# Altium PCB FEEL_2021.PcbDoc
Units mm, origin at the board's own origin, x right, y up, seen from the top; angles counter-clockwise.
Board outline 40 x 30 mm, 4 copper layers (Top Layer, GND, POWER, Bottom Layer), stack 0.898 mm thick; 64 components, 51 nets, 256 pads, 253 vias.
Unrouted connection lines stored in the file: 6.
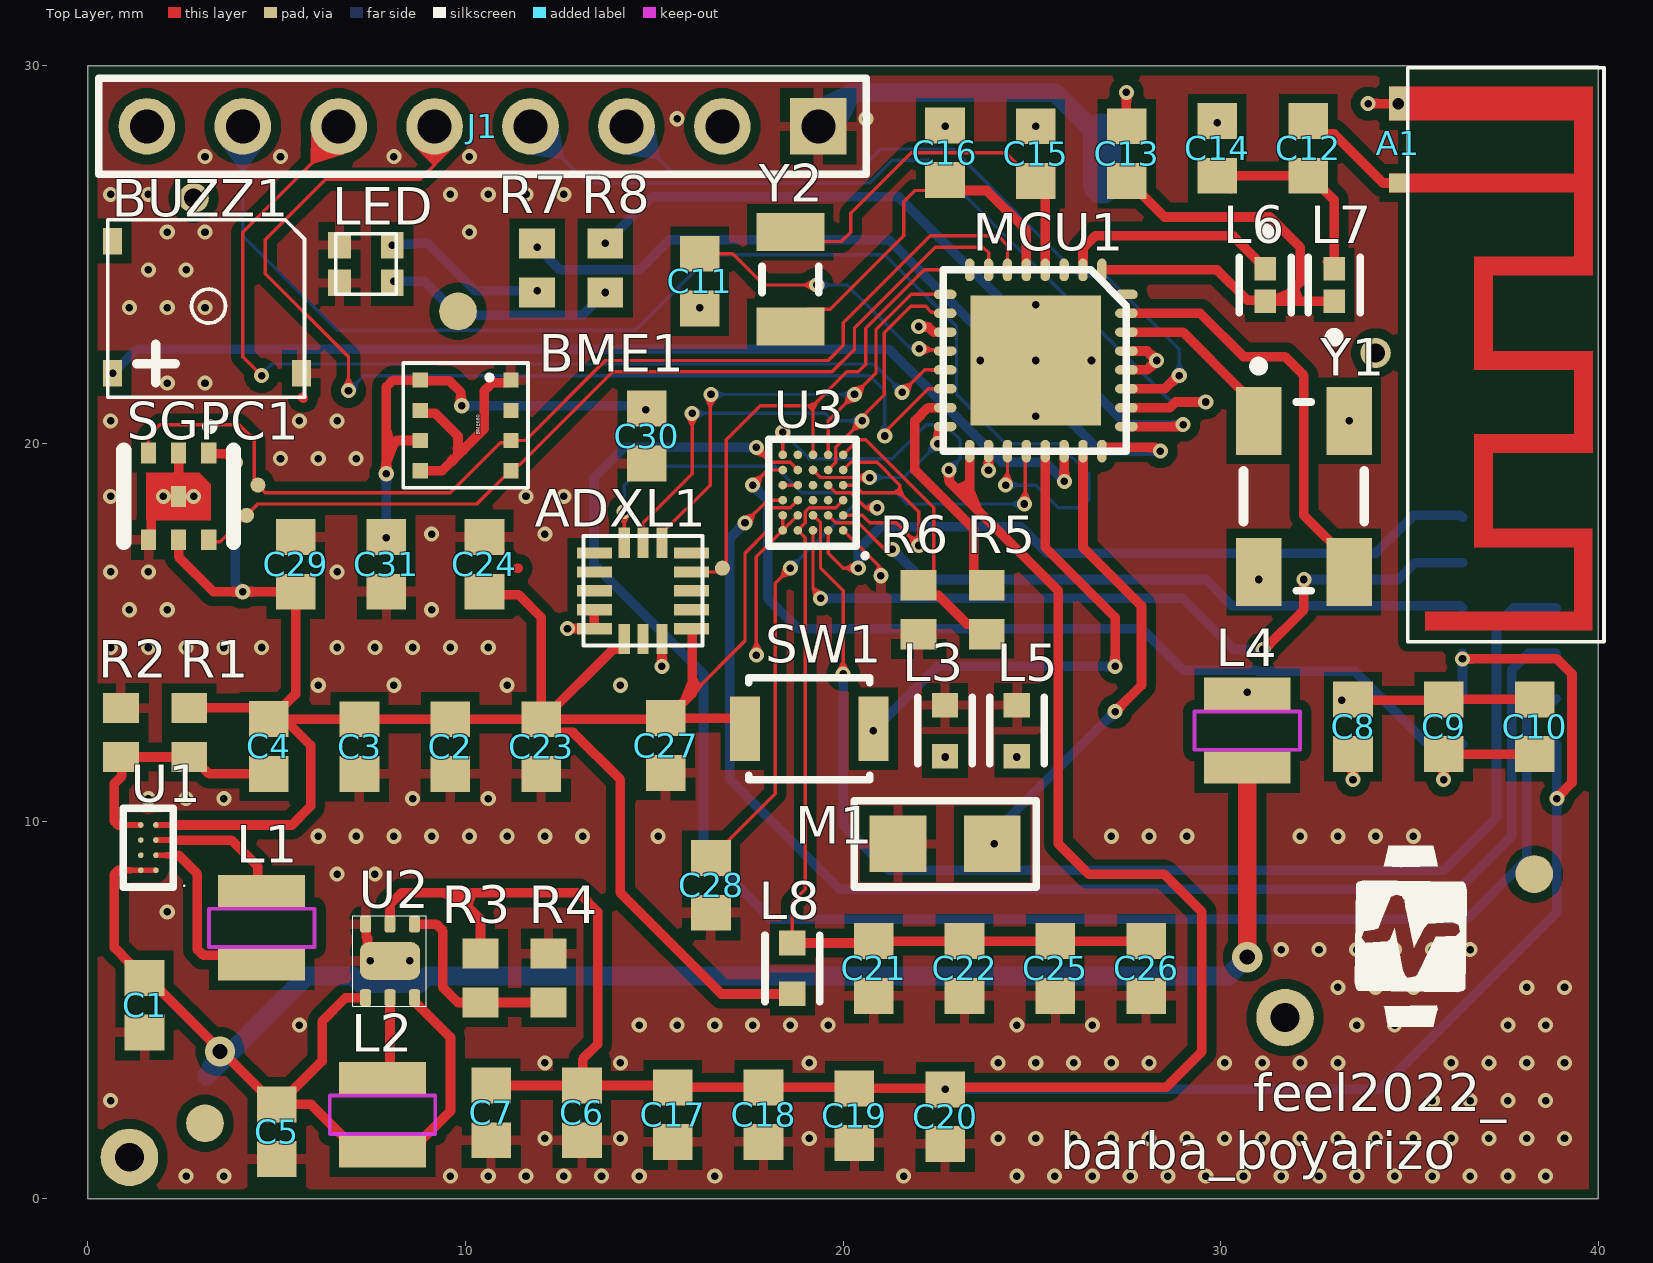
[diagram p0: Top Layer view]
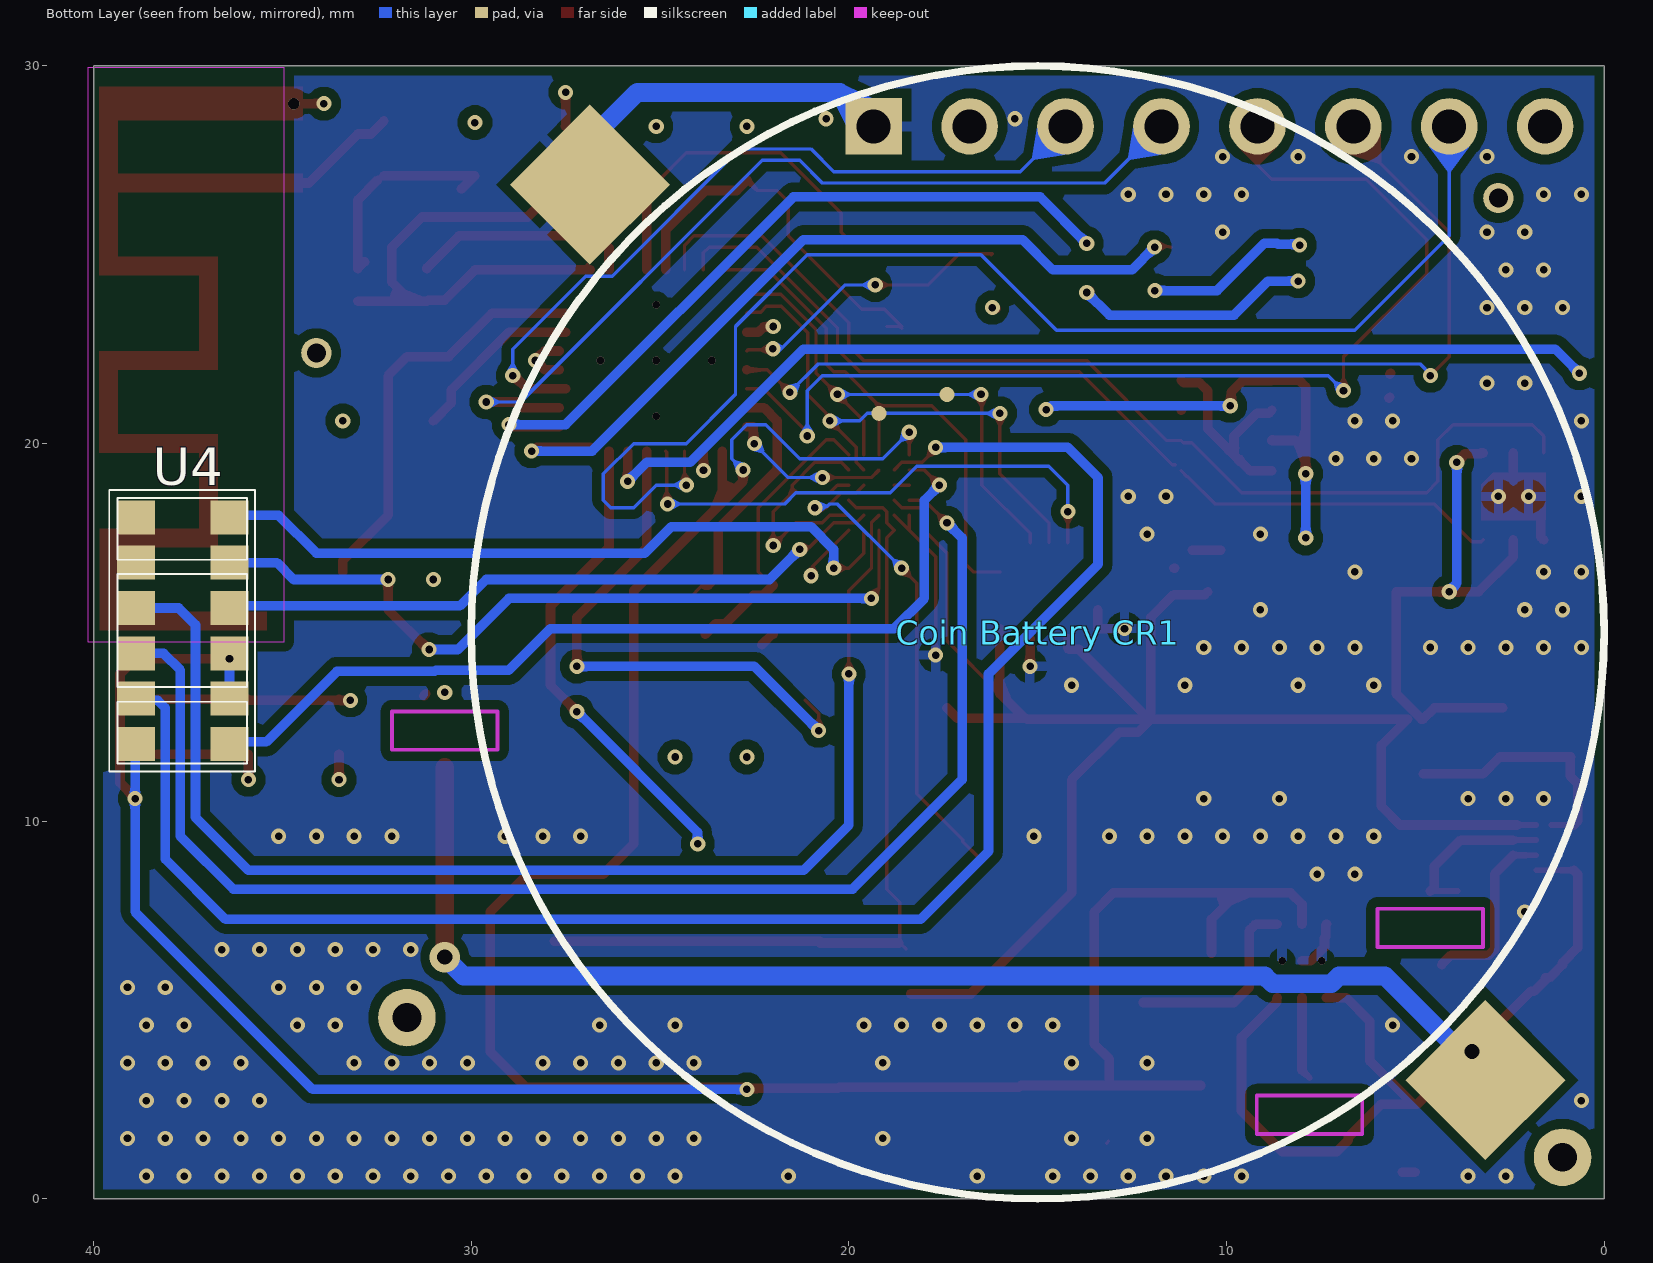
[diagram p1: Bottom Layer view, seen from below]
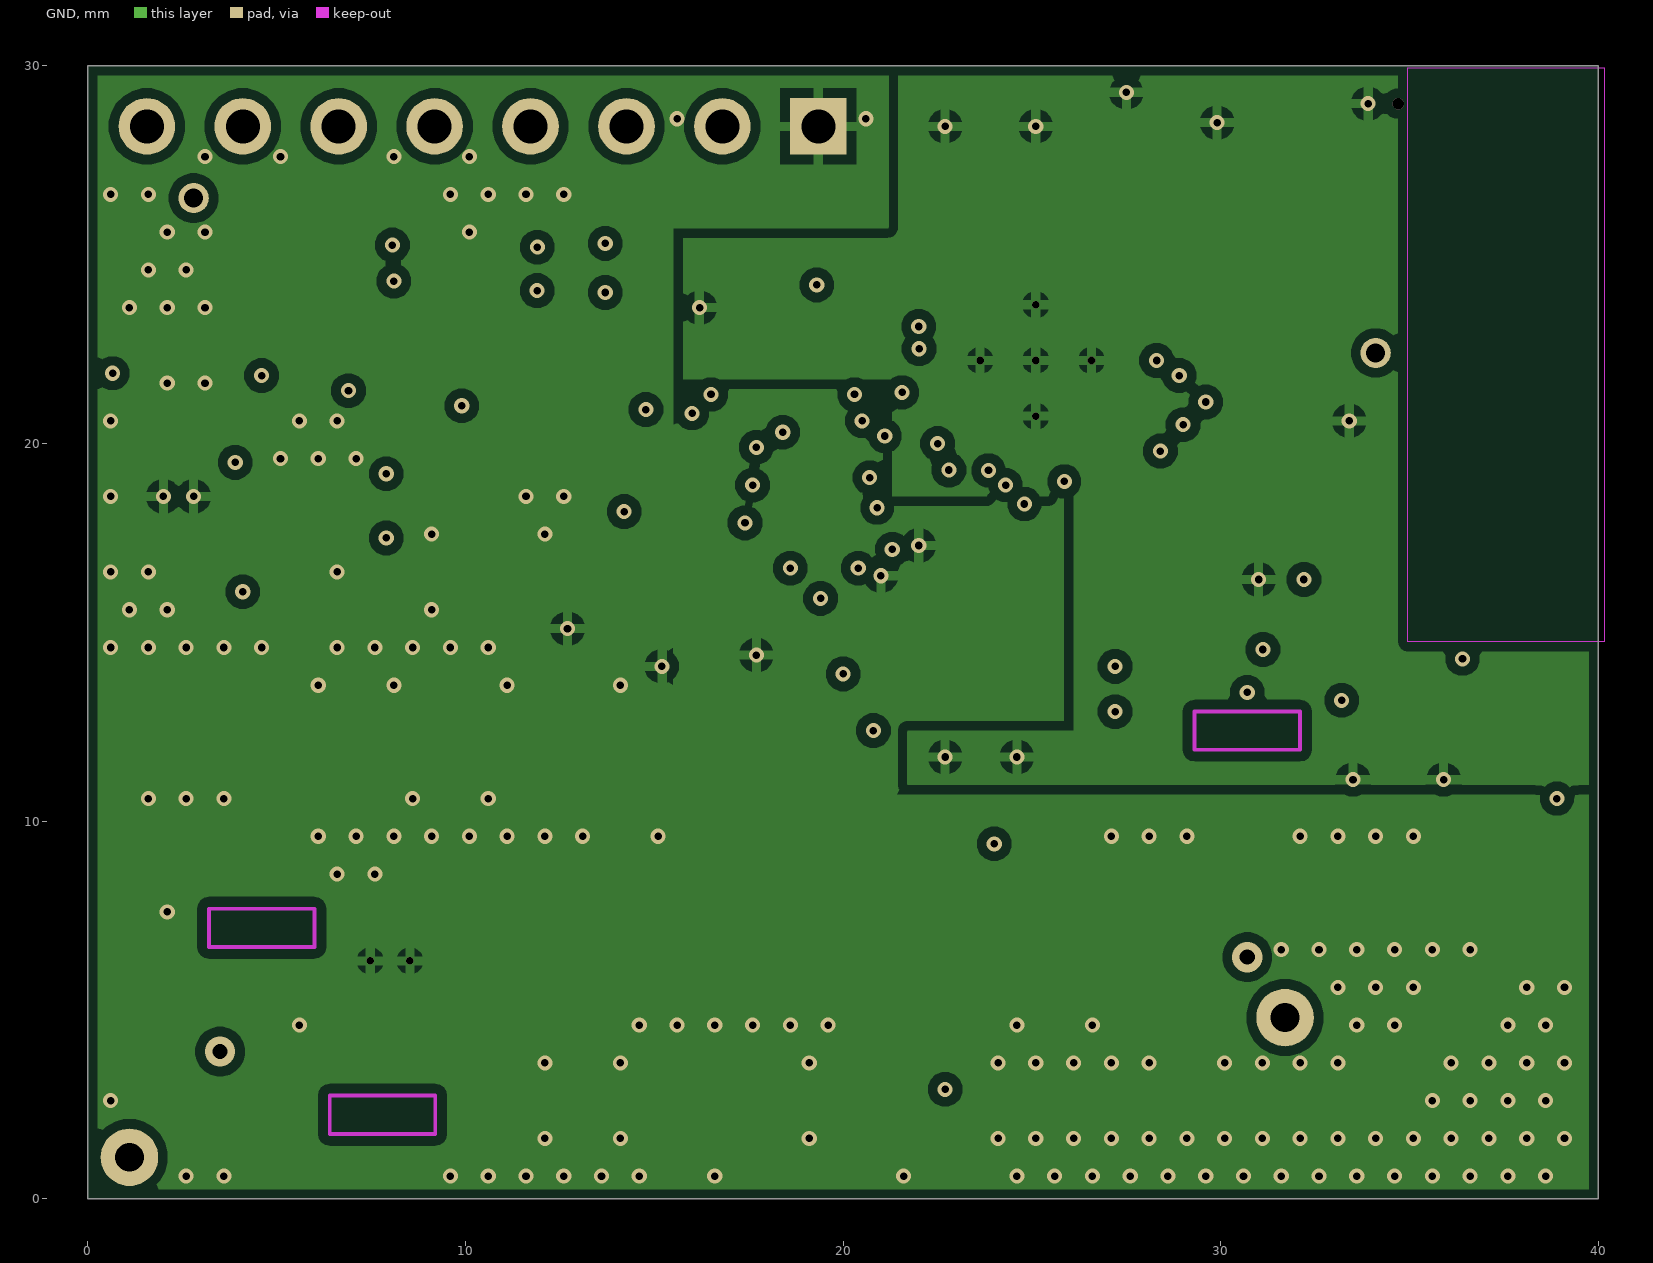
[diagram p2: GND]
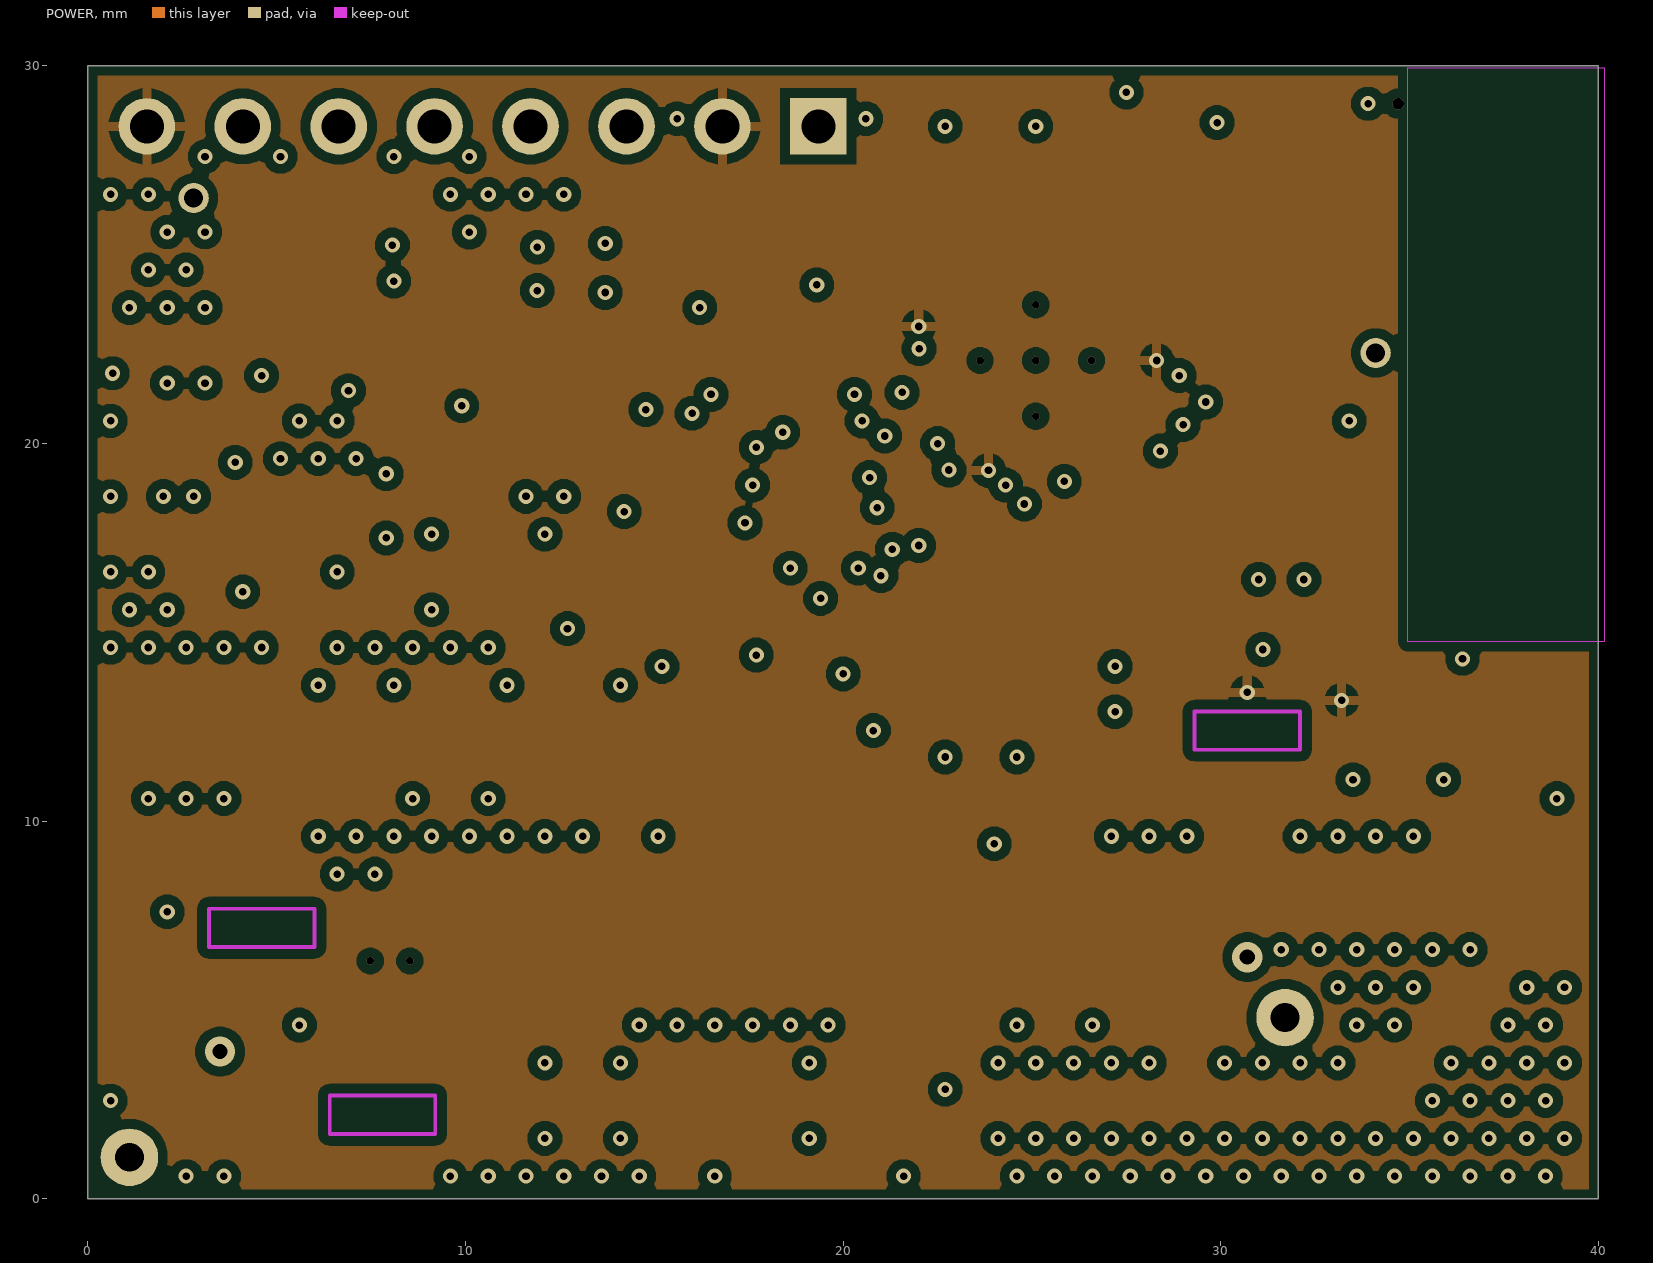
[diagram p3: POWER]
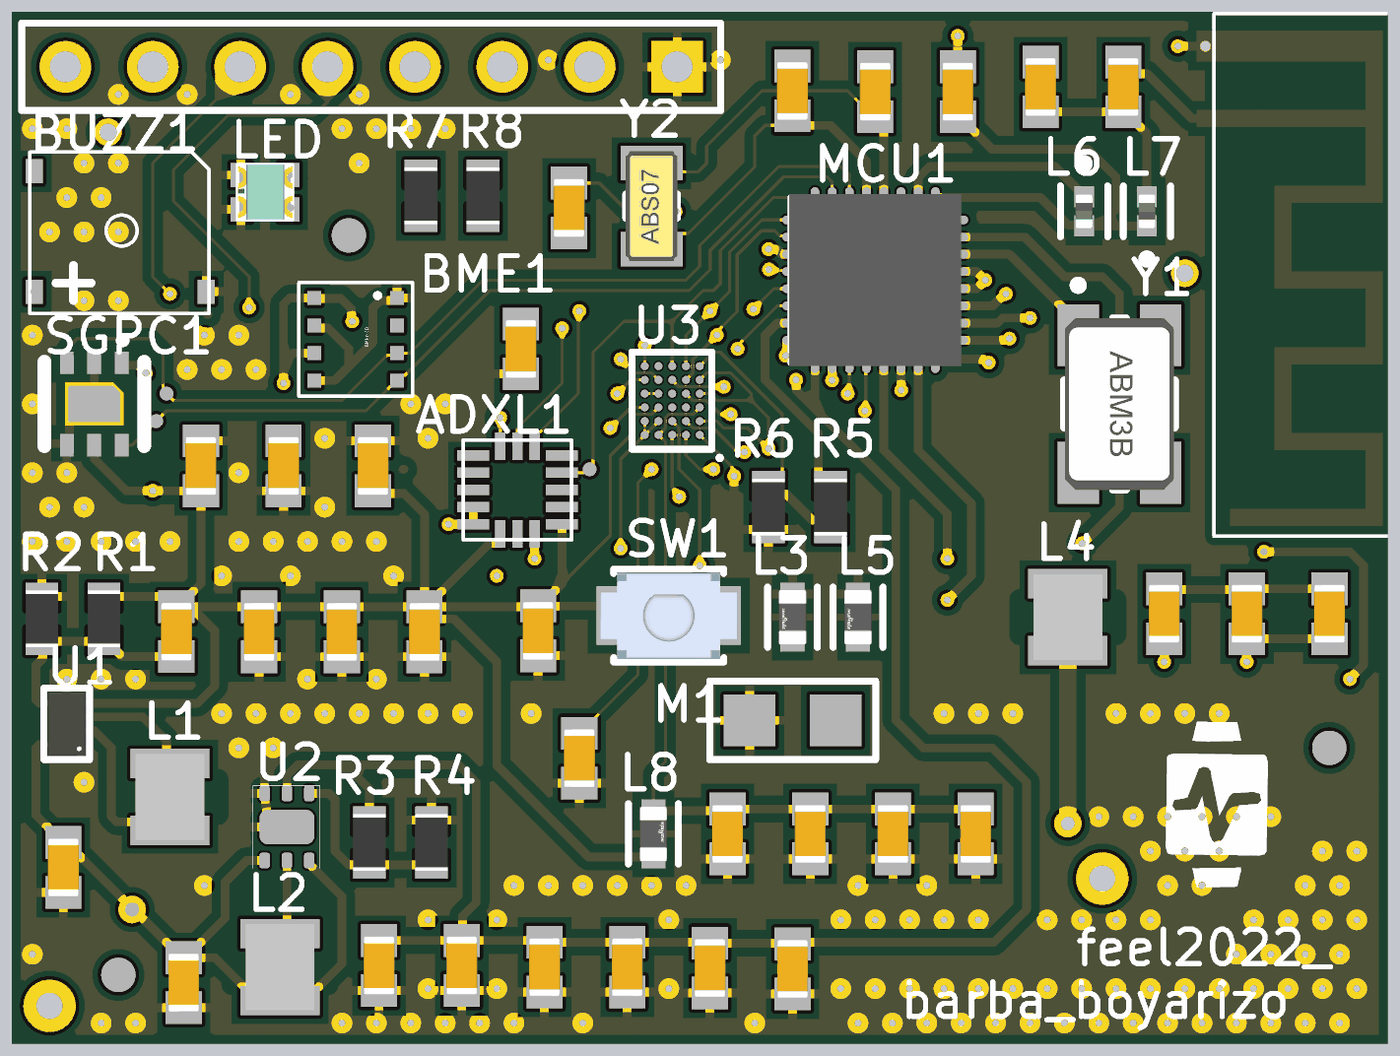
[diagram p4: 3D render of the assembled board from above, using the file's embedded part models]

## Layer stack, top to bottom
Top Solder: solder mask 0.0102, Solder Resist, Dk 3.5
Top Layer: signal copper 0.0356
Dielectric 2: prepreg 0.2184, FR-4, Dk 4.5
GND: signal copper 0.035
Dielectric 1: dielectric 0.32, FR-4, Dk 4.8
POWER: signal copper 0.035
Dielectric 3: prepreg 0.2184, FR-4, Dk 4.5
Bottom Layer: signal copper 0.0356
Bottom Solder: solder mask 0.0102, Solder Resist, Dk 3.5

## Board outline
0,0 40,0 40,30 0,30

## Design rules (kind name [scope] priority, off if disabled: settings)
BoardOutlineClearance [All] p1: gap=0.254 ignorepadtopadclearanceinfootprint=FALSE except(0: Arc-SplitContinuation Track-SplitContinuation SMDPad-SplitContinuation THPad-SplitContinuation Via-SplitContinuation Fill-SplitContinuation Poly-SplitContinuation Region-SplitContinuation Text-SplitContinuation)
Clearance [All] p1: gap=0.254 ignorepadtopadclearanceinfootprint=TRUE except(0: Arc-Hole Track-Hole SMDPad-Hole THPad-Hole Via-Hole Fill-Hole Poly-Hole Region-Hole Text-Hole; 0.127: Arc-Arc Arc-Track Track-Track SMDPad-SMDPad; 0.33: Arc-THPad Track-THPad; 0.5: SMDPad-THPad THPad-THPad)
FanoutControl Fanout_BGA [IsBGA] p1 off: bgadir=Out bgaviamode=Centered fanoutstyle=Auto fanoutdirection=Alternating viagrid=0.025 // Fanout_BGA (Default Rule)
FanoutControl Fanout_LCC [IsLCC] p2 off: bgadir=Out bgaviamode=Centered fanoutstyle=Auto fanoutdirection=Alternating viagrid=0.025 // Fanout_LCC (Default Rule)
FanoutControl Fanout_SOIC [IsSOIC] p3 off: bgadir=Out bgaviamode=Centered fanoutstyle=Auto fanoutdirection=Alternating viagrid=0.025 // Fanout_SOIC (Default Rule)
FanoutControl Fanout_Small [(CompPinCount < 5)] p4 off: bgadir=Out bgaviamode=Centered fanoutstyle=Auto fanoutdirection=OutThenIn viagrid=0.025 // Fanout_Small (Default Rule)
FanoutControl Fanout_Default [All] p5 off: bgadir=Out bgaviamode=Centered fanoutstyle=Auto fanoutdirection=Alternating viagrid=0.025 // Fanout_Default (Default Rule)
PolygonConnect [All] p1: connectstyle=Relief reliefconductorwidth=0.254 reliefentries=4 polygonreliefangle="90 Angle" airgapwidth=0.254
RoutingVias [All] p1: holewidth=0.711 width=1.27 viastyle="Through Hole" minholewidth=0.2 minwidth=0.4 maxholewidth=6.3 maxwidth=6.5
SolderMaskExpansion [All] p1: expansion=0.102 istentingtop=FALSE
Width [All] p1: maxlimit=0.5 minlimit=0.09 preferedwidth=0.254
25 further rules are at their usual default settings.

## Classes and differential pairs
component class Sensors: ADXL1 BME1 C17 C18 C19 C20 C21 C22 C23 C24 C25 C26 C27 C28 C29 C30 C31 L8 R5 R6 SGPC1 SW1 U3 U4
component class "Power Management": C1 C2 C3 C4 C5 C6 C7 "Coin Battery CR1" L1 L2 R1 R2 R3 R4 U1 U2
component class MCU: A1 C8 C9 C10 C11 C12 C13 C14 C15 C16 J1 L3 L4 L5 L6 L7 MCU1 Y1 Y2
component class Actuators: BUZZ1 LED M1 R7 R8

## Components (designator, comment, footprint, x,y, rotation, side; value= is the part's Value field where it differs from the comment)
A1 "-" PCBAntenna 34.448,29.45 r270 top net-tie
ADXL1 "" "ADXL362 - duplicate" 14.7,16.1 r180 top
BME1 "BME680_Sen_4in1" BME_LGA8 10,20.48 r0 top
BUZZ1 "Surface_Mount_Buzzer" buzzer 0.654,21.862 r0 top
C1 "10µF" CAPC1608X90X35ML10T15 1.5,5.125 r90 top
C2 "10µF" CAPC1608X90X35ML10T15 9.596,11.975 r90 top
C3 "22µF" CAPC1608X90X35ML10T15 7.191,11.975 r90 top
C4 "10pF" CAPC1608X90X35ML10T15 4.787,11.979 r90 top
C5 "10µF" CAPC1608X90X35ML10T15 5,1.775 r270 top
C6 "10µF" CAPC1608X90X35ML10T15 13.083,2.275 r90 top
C7 "10µF" CAPC1608X90X35ML10T15 10.679,2.275 r90 top
C8 "0.1µF" CAPC1608X90X35ML10T15 33.5,12.5 r90 top
C9 "0.1µF" CAPC1608X90X35ML10T15 35.904,12.5 r90 top
C10 "10µF" CAPC1608X90X35ML10T15 38.309,12.5 r90 top
C11 "1µF" CAPC1608X90X35ML10T15 16.2,24.3 r270 top
C12 "12pF" CAPC1608X90X35ML10T15 32.313,27.815 r90 top
C13 "1.2pF" CAPC1608X90X35ML10T15 27.504,27.678 r270 top
C14 "1.2pF" CAPC1608X90X35ML10T15 29.908,27.815 r270 top
C15 "12pF" CAPC1608X90X35ML10T15 25.1,27.678 r270 top
C16 "12pF" CAPC1608X90X35ML10T15 22.696,27.7 r270 top
C17 "1000pF" CAPC1608X90X35ML10T15 15.487,2.225 r90 top
C18 "0.1µF" CAPC1608X90X35ML10T15 17.891,2.225 r90 top
C19 "22µF" CAPC1608X90X35ML10T15 20.296,2.2 r90 top
C20 "22µF" CAPC1608X90X35ML10T15 22.7,2.175 r90 top
C21 "0.1µF" CAPC1608X90X35ML10T15 20.809,6.1 r90 top
C22 "0.1µF" CAPC1608X90X35ML10T15 23.213,6.1 r90 top
C23 "100nF" CAPC1608X90X35ML10T15 12,11.975 r90 top
C24 "100nF" CAPC1608X90X35ML10T15 10.5,16.8 r270 top
C25 "1000pF" CAPC1608X90X35ML10T15 25.617,6.1 r90 top
C26 "0.1µF" CAPC1608X90X35ML10T15 28.021,6.1 r90 top
C27 "0.1µF" CAPC1608X90X35ML10T15 15.3,12.004 r90 top
C28 "0.1µF" CAPC1608X90X35ML10T15 16.5,8.3 r90 top
C29 "100nF" CAPC1608X90X35ML10T15 5.5,16.8 r90 top
C30 "100nF" CAPC1608X90X35ML10T15 14.8,20.2 r90 top
C31 "100nF" CAPC1608X90X35ML10T15 7.904,16.8 r90 top
"Coin Battery CR1" "" CR3032 15,15 r45 bottom
J1 "" HDR1X8 19.34,28.4 r180 top
L1 "1µH" "SMD 2510" 4.6,7.175 r270 top
L2 "2.2µH" "SMD 2510" 7.8,2.225 r270 top
L3 "1500 ohm" FP-BLM18-0_15-t0_8-MFG 22.696,12.4 r270 top
L4 "10µH" "SMD 2510" 30.7,12.4 r90 top
L5 "1500 ohm" FP-BLM18-0_15-t0_8-MFG 24.6,12.4 r270 top
L6 "15nH" FP-LQG15HH_02-IPC_B 31.173,24.2 r270 top
L7 "2nH" FP-LQG15HH_02-IPC_B 33,24.2 r90 top
L8 "1500 ohm" FP-BLM18-0_15-t0_8-MFG 18.654,6.1 r90 top
LED "LED" LED_SMD 6.262,25.705 r0 top (schematic designator *1)
M1 "MOTOR" Motor 22.7,9.4 r180 top
MCU1 "" DEOP2021-Calle-Payno 26.85,24.6 r270 top
R1 "164K" RESC1609X50X30NL8T20 2.683,12.35 r90 top
R2 "51.1K" RESC1609X50X30NL8T20 0.879,12.35 r90 top
R3 "320K" RESC1609X50X30NL8T20 10.396,5.85 r270 top
R4 "100K" RESC1609X50X30NL8T20 12.2,5.85 r90 top
R5 "499" RESC1609X50X30NL8T20 23.8,15.6 r270 top
R6 "499K" RESC1609X50X30NL8T20 21.996,15.6 r90 top
R7 "330" RESC1609X50X30NL8T20 11.896,24.651 r90 top
R8 "330" RESC1609X50X30NL8T20 13.7,24.651 r90 top
SGPC1 "SGPC3" "DFN 6-pin" 2.4,18.6 r270 top
SW1 "" FP-B3U-1000P-MFG 19.1,12.447 r0 top
U1 "" tps63036 1.6,9.3 r180 top
U2 "" SOP6 7.35,5.325 r90 top
U3 "AFE4420 - DSBGA" "AFE4420 - DSBGA" 19.2,18.7 r180 top
U4 "" SFH7072 39.555,18.75 r270 bottom
Y1 "24 MHz" ABRA-ABM3B-4_V 32.2,18.6 r270 top
Y2 "32.768 KHz" ABRA-ABS07_A_V 18.6,24.35 r90 top

## Footprints (in the part's own frame and the unit in brackets; to place one, negate y for a bottom-side part, rotate by r counter-clockwise, add the part's x,y. Pads: shape width x height; smd on the part's side, far side on the other; paste and mask are expansions set on the pad)
ABRA-ABM3B-4_V [mm] "SMD, 4-Leads, Body 5x3.2mm"
  rect 1.8x1.2 smd: 1(-2,-1.2) 2(2,-1.2) 3(2,1.2) 4(-2,1.2)
  silkscreen extent -3.57,-1.6 2.5,1.6, body extent -2.5,-1.59 2.5,1.59, height 1.13
ABRA-ABS07_A_V [mm] "SMD, 2-Leads, Body 3.2x1.5mm"
  rect 1x1.8 smd: 1(-1.25,0) 2(1.25,0)
  silkscreen extent -0.35,-0.75 0.35,0.75, body extent -1.6,-0.75 1.6,0.75, height 0.9
"ADXL362 - duplicate" [mm]
  rect 0.925x0.3 smd: 1(-1.288,1) 2(-1.288,0.5) 3(-1.288,0) 4(-1.288,-0.5) 5(-1.288,-1) 9(1.288,-1) 10(1.288,-0.5) 11(1.288,0) 12(1.288,0.5) 13(1.288,1)
  rect 0.3x0.8 smd: 6(-0.5,-1.275) 7(0,-1.275) 8(0.5,-1.275) 14(0.5,1.275) 15(0,1.275) 16(-0.5,1.275)
  silkscreen extent -1.58,-1.45 1.58,1.45, body extent -1.63,-1.5 1.63,1.5, height 1.06
"AFE4420 - DSBGA" [mm]
  round 0.23 smd paste+0 mask+0.05: A1(-0.8,1)
  round 0.23 smd mask+0.05: A2(-0.4,1) A3(0,1) A4(0.4,1) A5(0.8,1) B1(-0.8,0.6) B2(-0.4,0.6) B3(0,0.6) B4(0.4,0.6) B5(0.8,0.6) C1(-0.8,0.2) C2(-0.4,0.2) C3(0,0.2) C4(0.4,0.2) C5(0.8,0.2) D1(-0.8,-0.2) D2(-0.4,-0.2) D3(0,-0.2) D4(0.4,-0.2) D5(0.8,-0.2) E1(-0.8,-0.6) E2(-0.4,-0.6) E3(0,-0.6) E4(0.4,-0.6) E5(0.8,-0.6) F1(-0.8,-1) F2(-0.4,-1) F3(0,-1) F4(0.4,-1) F5(0.8,-1)
  silkscreen extent -1.4,-1.41 1.17,1.69, body extent -1.02,-1.28 1.04,1.29, height 0.5
BME_LGA8 [mm] "LGA, 8-Leads, Body 3,00x3,00mmx0,93mm, Pitch 0,80mm"
  rect 0.4x0.4 smd: 1(1.2,1.2) 2(1.2,0.4) 3(1.2,-0.4) 4(1.2,-1.2) 5(-1.2,-1.2) 6(-1.2,-0.4) 7(-1.2,0.4) 8(-1.2,1.2)
  silkscreen extent -1.65,-1.65 1.65,1.65, body extent -1.7,-1.7 1.7,1.7, height 1.2
buzzer [mm]
  rect 0.5x0.7 smd: 1(0,0) 2(5,0) 3(0,3.5)
  silkscreen extent -0.13,-0.64 5.08,4.06, body extent -0.13,-0.64 5.08,4.06, height 2
CAPC1608X90X35ML10T15 [mm] "Chip Capacitor, 2-Leads, Body 1.7x0.9mm, IPC Low Density"
  rect 0.95x1.05 smd: 1(-0.725,0) 2(0.725,0)
  body extent -0.85,-0.45 0.85,0.45, height 0.9
CR3032 [mm]
  rect 3x3 smd: 1(-16.764,0) 2(16.764,0)
  silkscreen extent -15,-15 15,15, body extent -15,-15 15,15, height 3.2
DEOP2021-Calle-Payno [mm]
  oval 0.6x0.25 smd mask+0.07: 1(0,0) 2(0,-0.5) 3(0,-1) 4(0,-1.5) 5(0,-2) 6(0,-2.5) 7(0,-3) 8(0,-3.5) 17(4.8,-3.5) 18(4.8,-3) 19(4.8,-2.5) 20(4.8,-2) 21(4.8,-1.5) 22(4.8,-1) 23(4.8,-0.5) 24(4.8,0)
  oval 0.25x0.6 smd mask+0.07: 9(0.65,-4.15) 10(1.15,-4.15) 11(1.65,-4.15) 12(2.15,-4.15) 13(2.65,-4.15) 14(3.15,-4.15) 15(3.65,-4.15) 16(4.15,-4.15) 25(4.15,0.65) 26(3.65,0.65) 27(3.15,0.65) 28(2.65,0.65) 29(2.15,0.65) 30(1.65,0.65) 31(1.15,0.65) 32(0.65,0.65)
  rect 3.45x3.45 smd: 33(2.4,-1.75)
  silkscreen extent 0,-4.2 4.8,0.65, body extent -0.1,-4.25 4.9,0.75, height 1
"DFN 6-pin" [mm] "Used for SGPC3 sensor"
  rect 0.55x0.4 smd mask+0: 1(-1.15,0.8) 2(-1.15,0) 3(-1.15,-0.8) 4(1.15,-0.8) 5(1.15,0) 6(1.15,0.8) 7(0,0)
  Top Layer region: 0.625,-0.85 -0.625,-0.85 -0.625,0.55 -0.325,0.85 0.625,0.85
  silkscreen extent -1.85,-1.45 1.22,1.45, body extent -1.22,-1.22 1.22,1.22, height 0.9
FP-B3U-1000P-MFG [mm]
  rect 0.8x1.7 smd paste+0 mask+0: 1(-1.7,0) 2(1.7,0)
  silkscreen extent -1.6,-1.35 1.6,1.35, body extent -2.2,-1.45 2.2,1.45, height 0.25
FP-BLM18-0_15-t0_8-MFG [mm]
  rect 0.65x0.7 smd paste+0 mask+0: 1(-0.675,0) 2(0.675,0)
  silkscreen extent -0.87,-0.72 0.87,0.72, body extent -1.1,-0.58 1.1,0.58, height 0.25
FP-LQG15HH_02-IPC_B [mm]
  rect 0.615x0.572 smd paste+0 mask+0: 1(-0.429,0) 2(0.429,0)
  silkscreen extent -1.51,-0.69 0.74,0.69, body extent -0.89,-0.44 0.89,0.44, height 0.25
HDR1X8 [mm] "Connector; Header; 8 Position"
  rect 1.5x1.5 hole 0.9: 1(0,0)
  round 1.5 hole 0.9: 2(2.54,0) 3(5.08,0) 4(7.62,0) 5(10.16,0) 6(12.7,0) 7(15.24,0) 8(17.78,0)
  silkscreen extent -1.27,-1.27 19.05,1.27
LED_SMD [mm]
  rect 0.6x0.7 smd: 1(0.4,-1.45) 2(1.8,-1.45) 3(0.4,-0.45) 4(1.8,-0.45)
  silkscreen extent 0.3,-1.75 1.9,-0.15, body extent 0.31,-1.75 1.91,-0.15, height 0.7
Motor [mm]
  rect 1.5x1.5 smd: 1(-1.25,0) "2 +"(1.25,0)
  silkscreen extent -2.41,-1.14 2.41,1.14
PCBAntenna [mm]
  rect 0.5x0.5 smd paste-0.25 mask+0: 1(2.55,0.25)
  rect 0.9x0.5 smd paste-0.45 mask+0: 2(0.45,0.25)
  Top Layer region: -0.001,0 0.899,0 0.899,4.953 -0.001,4.953
  Top Layer region: 2.299,0 2.799,0 2.799,4.953 2.299,4.953
  Top Layer region: 11.7,4.899 14.4,4.899 14.4,5.399 11.7,5.399
  Top Layer region: 11.7,2.259 12.2,2.259 12.2,4.952 11.7,4.952
  Top Layer region: 9.651,2.26 11.81,2.26 11.81,2.76 9.651,2.76
  Top Layer region: 9.2,2.259 9.7,2.259 9.7,4.952 9.2,4.952
  Top Layer region: 6.999,4.9 9.699,4.9 9.699,5.4 6.999,5.4
  Top Layer region: 6.999,2.26 7.499,2.26 7.499,4.953 6.999,4.953
  Top Layer region: 4.952,2.26 7.111,2.26 7.111,2.76 4.952,2.76
  Top Layer region: 4.499,2.26 4.999,2.26 4.999,4.953 4.499,4.953
  Top Layer region: -0.001,4.9 4.999,4.9 4.999,5.4 -0.001,5.4
  Top Layer region: 13.9,0.96 14.4,0.96 14.4,4.953 13.9,4.953
  Keep-Out Layer region: -0.5,0.5 -0.5,5.7 14.7,5.7 14.7,0.5
  silkscreen extent -0.5,0.5 14.7,5.7
RESC1609X50X30NL8T20 [mm] "Chip Resistor, 2-Leads, Body 1.65x0.95mm, IPC Medium Density"
  rect 0.8x0.95 smd: 1(-0.65,0) 2(0.65,0)
  body extent -0.82,-0.48 0.82,0.48, height 0.5
SFH7072 [mm]
  rect 0.9x1 smd: 1(0.705,3.155) 2(1.905,3.155) 3(3.105,3.155) 4(4.305,3.155) 5(5.505,3.155) 6(6.705,3.155) 7(6.705,0.679) 8(5.505,0.679) 9(4.305,0.679) 10(3.105,0.679) 11(1.905,0.679) 12(0.705,0.679)
  silkscreen extent -0.02,-0.03 7.44,3.83, body extent -0.01,-1.83 7.44,5.63, height 0.9
"SMD 2510" [mm] "Chip Inductor, 2-Leads, Body 2.5x2.0mm, IPC Medium Density"
  rect 0.85x2.3 smd: 1(-0.975,0) 2(0.975,0)
  Keep-Out Layer lines w0.1: 0.508,-1.397 -0.508,-1.397 -0.508,1.397 0.508,1.397 0.508,-1.397
  body extent -1.25,-1 1.25,1, height 1
SOP6 [mm]
  rrect50% 0.45x0.3 smd mask+0.07: 1(0,0) 2(0,-0.65) 3(0,-1.3) 4(1.95,-1.3) 5(1.95,-0.65) 6(1.95,0)
  rrect50% 1x1.6 smd mask+0.07: 7(0.975,-0.65)
  silkscreen extent -0.23,-1.61 2.17,0.34, body extent -0.22,-1.61 2.17,0.34, height 0.8
tps63036 [mm]
  round 0.15 smd: A1(-0.2,0.6) A2(0.2,0.6) B1(-0.2,0.2) B2(0.2,0.2) C1(-0.2,-0.2) C2(0.2,-0.2) D1(-0.2,-0.6) D2(0.2,-0.6)
  silkscreen extent -0.66,-1.04 0.66,1.04, body extent -0.54,-0.9 0.54,0.9, height 0.63

## Part data
A1: library part PCBAntenna, "GND pin has a via to a GND plane that is not included in the footprint, but has to be included in the final PCB layout design."
ADXL1: library part ADXL362
C1 C2 C3 C4 C5 C6 C7: library part CMP-2000-04945-1, Capacitance=22pF, Case Size/Dimension=0603, Dielectric=C0G, Manufacturer=Murata, Package Description="2-Pin Surface Mount Device, Body 1.6 x 0.8 mm", Package Reference=603, Rated Voltage=50V, Tolerance (%)=±5%, Datasheet URL=https://datasheet.ciiva.com/11786/0900766b807a1cab-11786398.pdf, Datasheet Version=Jul-06, Manufacturer URL=http://www.murata.com/
C8 C9 C10 C11 C12 C13 C14 C15 C16 C17 C18 C19 C20 C21 C22 C23 C24 C25 C26 C27 C28 C29 C30 C31: library part CMP-2000-04945-1, "Chip Capacitor, 22 pF, +/- 5%, 50 V, -55 to 125 degC, 0603 (1608 Metric), RoHS, Tape and Reel", Capacitance=22pF, Case Size/Dimension=0603, Dielectric=C0G, Manufacturer=Murata, Package Description="2-Pin Surface Mount Device, Body 1.6 x 0.8 mm", Package Reference=603, Rated Voltage=50V, Tolerance (%)=±5%, Datasheet URL=https://datasheet.ciiva.com/11786/0900766b807a1cab-11786398.pdf, Datasheet Version=Jul-06, Manufacturer URL=http://www.murata.com/
"Coin Battery CR1": library part CR3032
J1: library part "Header 8", "Header, 8-Pin", LatestRevisionDate=17-Jul-2002, LatestRevisionNote="Re-released for DXP Platform.", Publisher="Altium Limited"
L1 L2 L4: library part CMP-1411-00017-1, "Power Multilayer Inductor WE-MAPI, L=10.0µH", Inductance=10.0ÂµH, Manufacturer="Wuerth Elektronik", PartNumber=74438323100, ComponentLink1Description="Manufacturer URL", ComponentLink1URL=http://www.we-online.com, ComponentLink2Description=Datasheet, ComponentLink2URL=http://katalog.we-online.de/kataloge/eisos/media/pdf/74438323100.pdf, PackageReference="SMD 2510"
L3 L5 L8: library part CMP-0686-00354-3, "Chip Ferrite Bead, 0603, 600Ω @ 100MHz, 0.35Ω, 25%, 500mA", Case Code (Imperial)=0603, Case Code (Metric)=1608, Current Rating=500mA, DC Resistance (DCR)=350mR, Frequency=100MHz, Manufacturer Series=BLM18E, Max Operating Temperature=125°C, Min Operating Temperature=-55°C, Package Quantity=1, Tolerance=25%, Case/Package=0603, Contact Plating=Tin, Core Material=Ferrite, DC Current=500mA, DC Resistance-Max=350mR, Depth=0.8mm, Height=0.8mm, Impedance=600R, Lead Free="Lead Free", Length=1.6mm, Material=Steel, Max Current Rating=500mA, Max DC Current=500mA, Military Standard=Not, Number of Circuits=1, Number of Functions=1, Number of Lines=1, Number of Pins=2, Packaging="Tape and Reel", Radiation Hardening=No, REACH SVHC="No SVHC", Resistance=350mR, RoHS Compliant=Yes, Series=BLM18E, Shielding=Unshielded, Terminal Finish=Tin, Termination=SMD/SMT, Test Frequency=100MHz, Width=0.8mm
L6 L7: library part CMP-06042-001992-1, "Multilayer type RF Inductor 2.4nH ±0.3nH 0.1Ω 800mA 0402", Case Code (Imperial)=0402, Case Code (Metric)=1005, Current=300mA, DC Resistance (DCR)=160mR, Inductance=2.4nH, Max Operating Temperature=125°C, Min Operating Temperature=-55°C, Package Quantity=10000, Self Resonant Frequency=6GHz, Test Frequency=100MHz, Tolerance=5%, Case/Package=0402, Core Material=Air, Current Rating=300mA, DC Current=300mA, Depth=0.55mm, Height=0.5mm, Height - Seated (Max)=0.022inch, Lead Free="Lead Free", Length=1mm, Max DC Current=300mA, Military Standard=Not, Mount="Surface Mount", Number of Pins=2, Packaging="Tape and Reel", Q Factor=8, Radiation Hardening=No, REACH SVHC="No SVHC", Shielding=Unshielded, Termination=SMD/SMT, Width=0.5mm
MCU1: library part CC2640R2FRHB
R1 R2 R3 R4 R5 R6 R7 R8: library part CMP-2000-03816-5, "Chip Resistor, 0 Ohm, Jumper, 100 mW, -55 to 155 degC, 0603 (1608 Metric), RoHS, Tape and Reel", Manufacturer="Vishay Semiconductor", Max Operating Temperature="155 degC", Min Operating Temperature="-55 degC", Package Quantity=5000, Voltage Rating="75 V", ComponentLink1Description="Manufacturer URL", ComponentLink1URL=http://www.vishay.com/, ComponentLink2Description=Datasheet, ComponentLink2URL=http://www.vishay.com/docs/20035/dcrcwe3.pdf, DatasheetVersion=06/2012, Height="0.45 mm", Length="1.55 mm", Mount="Surface Mount", Mounting Technology="Surface Mount", PackageDescription="2-Pin Surface Mount Device, Body 1.575 x 0.85 mm", PackageReference=0603, Packaging="Tape and Reel", Pins=2, REACH SVHC=Unknown, RoHSCompliant=true
SGPC1: "Indoor Air Quality Sensor for TVOC Measurements"
SW1: library part CMP-2100-03586-2, "SWITCH TACTILE SPST-NO 0.05A 12V", Contact Current Rating=50mA, Contact Resistance=100mR, Insulation Resistance=100MR, Max Operating Temperature=70°C, Max Voltage Rating (DC)=12V, Min Operating Temperature=-25°C, Operating Force=1.5N, Package Quantity=1, Ratings="Dust Proof", Actuator Length=0.4mm, Actuator Type=Standard, Contact Material=Silver, Current Rating=50mA, Depth=2.5mm, Electrical Life=200000Cycles, Height=1.2mm, Illumination Type=Non-Illuminated, Lead Free="Lead Free", Length=4mm, Max Current Rating=50mA, Mechanical Life=200000Cycles, Mount="Surface Mount", Orientation=Straight, Packaging="Tape and Reel", Switch Function=Off-Mom, Switch Travel=0.15mm, Termination=SMD/SMT, Throw Configuration=SPST, Voltage Rating (DC)=12V, Weight=0.000776oz, Width=3mm
U1: library part TPS63036, "Non-inverting buck-boost / converter able to provide a regulated output voltage / from an input supply that can be higher or lower than / the output voltage"
U2: library part TSP61099-WSON
U4: library part SFH7072, "Sensor biométrico"
Y1: library part CMP-1688-00008-1, "Ceramic SMD Crystal, 24 MHz, +/- 20 ppm, 50 Ohm, -20 to 70 degC, 4-Pin SMD, RoHS, Tape and Reel", Frequency="6 Hz", Max Operating Temperature="155 degC", Min Operating Temperature="-40 degC", Package Quantity=2500, ComponentLink1Description="Manufacturer URL", ComponentLink1URL=http://www.abracon.com/, ComponentLink2Description=Datasheet, ComponentLink2URL=http://www.abracon.com/Resonators/abm3b.pdf, Contact Material=Brass, Contact Plating=Gold, DatasheetVersion=Aug-15, Fastening Type=Snap, Height="1.244 mm", Impedance="50 Ohm", Length="2.6 mm", Mating Cycles=30, Mount="Surface Mount", PackageDescription="4-Pin Surface Mount Device, Body 5 x 3.2 mm", PackageReference=ABM3B, Packaging="Tape and Reel", Radiation Hardening=No, REACH SVHC=Unknown, RoHSCompliant=true, Weight="0.001058 oz", Width="3 mm"
Y2: library part CMP-2000-07587-1, "Tuning Fork Crystal, 32.768 KHz, +/- 20 ppm, -40 to 85 degC, 2-Pin SMD, RoHS, Tape and Reel", Case\/Package=SMD/SMT, ESR (Equivalent Series Resistance)=55KOhm, Frequency=32.768KHz, Frequency Tolerance=20ppm, Load Capacitance=6pF, Manufacturer=Abracon, Max Operating Temperature=85degC, Min Operating Temperature=-40degC, Package Description="2-Pin Surface Mount Device, Body 3.2 x 1.5 mm", Package Quantity=3000, Package Reference=ABS07, Series Resistance=60KOhm, Datasheet URL=http://www.abracon.com/Resonators/ABS07-120-32.768kHz-T.pdf, Datasheet Version=11/2014, Depth=1.5mm, Height=0.035inch, Lead Free=LeadFree, Length=3.2mm, Manufacturer URL=http://www.abracon.com/, Mount=SurfaceMount, Mounting Technology=SurfaceMount, Number of Pins=2, Packaging=TapeandReel, Radiation Hardening=No, REACH SVHC=NoSVHC, RoHSCompliant=True, Termination=SMD/SMT, Tolerance=20ppm, Width=0.061inch

## Free pads (board coordinates)
  round 1.524 hole 0.762: 2(31.7,4.8) 3(1.1,1.1)
  round 0.8 hole 0.5: 4(34.1,22.4) 7(2.8,26.5)
  round 0.4 smd far side: 8(17.4,21.3) 9(19.2,20.8)
  round 0.4 smd: 10(4.5,18.9) 13(4.2,18.1) 14(16.8,16.7)
  round 1 smd: 15(9.8,23.5) 16(38.3,8.6) 17(3.1,2)

## Via types
v1: diameter 0.4, hole 0.2, Top Layer to Bottom Layer, 243 vias
v2: diameter 0.2, hole 0.2, Top Layer to Bottom Layer, 7 vias
v3: diameter 0.8, hole 0.4, Top Layer to Bottom Layer, 2 vias
v4: diameter 0.3, hole 0.3, Top Layer to Bottom Layer, 1 vias

## Nets (pads, with @x,y where several pads share a name; then routed paths per layer and width w, separated by ;. In a path a pad name is that pad's centre, name@x,y a point inside that pad or via, vN(x,y) a via of type N, cw(c..) or ccw(c..) an arc to the next point about the centre after c; other vN are vias at no path point)
GND: "Coin Battery CR1.2" "M1.2 +" ADXL1.12 ADXL1.13 ADXL1.16 BME1.1 BME1.5 BME1.7 BUZZ1.2 C1.1 C2.1 C3.1 C5.2 C6.1 C7.1 C17.1 C18.1 C19.1 C20.1 C21.1 C22.1 C23.1 C24.1 C25.1 C26.1 C27.1 C28.1 C29.2 C30.1 C31.1 J1.1 L3.1 L5.1 LED.1 LED.3 R2.2 R4.2 R6.1 SGPC1.2 SGPC1.4 SGPC1.7 U1.B2 U1.C2 U2.6 U2.7 U3.A1 U3.A5 U3.B1 U3.B4 U3.B5 U3.D1 U3.D4 U3.D5 U3.E1 | length 36.8
  Top Layer w0.09: C6.1@13.125,1.525 C6.1@13.175,1.475 ; v1(17.7,14.4) 17.7,17 U3.A5 ; U3.B5 U3.A5 ; U3.D5 U3.D4 ; U3.B4 U3.A5 ; U3.A1 20.953,16.747 20.953,16.547 v1(21,16.5) ; U3.B1 20.5,18.1 20.7,17.9 21.4,17.9 v1(22,17.3) 22,18.2 21.5,18.7 ; U3.D1 20.3,18.9 20.5,18.7 21.5,18.7 ; U3.E1 20.2,19.5 20.55,19.5 20.9,19.5 21.5,18.9 21.5,18.7
  Top Layer w0.254: SGPC1.4 1.673,17.523 1.673,18.073 1.9,18.3 ; SGPC1.7 SGPC1.2 ; C5.2@5,0.702 C5.2@5.348,0.702 ; BUZZ1.2 BUZZ1.2@5.677,21.839 ; 5.677,21.223 5.7,21.2 ; U2.6 7.368,7.257 7.368,6.932 7.403,6.897 7.403,6.664 7.767,6.3 U2.7 ; BME1.5 9.38,19.28 9.8,19.7 ; BME1.7 8.873,20.807 9.193,20.807 9.8,20.2 9.8,19.7 ; C24.1@10.152,17.177 C24.1@10.898,17.177 ; BME1.1 11.127,21.607 10.707,21.607 10.5,21.4 10.5,20.4 9.8,19.7 ; 11.375,16.7 11.4,16.7 ; v1(12.7,15.1) ADXL1.13 ADXL1.12 ; v1(15.2,14.1) ADXL1.16 ; R6.1 22.027,14.95 R6.1@22.3,14.677
  Bottom Layer w0.5: J1.1 20.24,29.3 25.6,29.3 26.854,28.046
  Bottom Layer w1: 26.854,26.854 26.854,28.246
  other v1: 2.6,0.6 3.6,0.6 9.6,0.6 10.6,0.6 11.6,0.6 12.6,0.6 13.6,0.6 14.6,0.6 16.6,0.6 21.6,0.6 24.6,0.6 25.6,0.6 26.6,0.6 27.6,0.6 28.6,0.6 29.6,0.6 30.6,0.6 31.6,0.6 32.6,0.6 33.6,0.6 34.6,0.6 35.6,0.6 36.6,0.6 37.6,0.6 38.6,0.6 12.1,1.6 14.1,1.6 19.1,1.6 24.1,1.6 25.1,1.6 26.1,1.6 27.1,1.6 28.1,1.6 29.1,1.6 30.1,1.6 31.1,1.6 32.1,1.6 33.1,1.6 34.1,1.6 35.1,1.6 36.1,1.6 37.1,1.6 38.1,1.6 39.1,1.6 0.6,2.6 35.6,2.6 36.6,2.6 37.6,2.6 38.6,2.6 12.1,3.6 14.1,3.6 19.1,3.6 24.1,3.6 25.1,3.6 26.1,3.6 27.1,3.6 28.1,3.6 30.1,3.6 31.1,3.6 32.1,3.6 33.1,3.6 36.1,3.6 37.1,3.6 38.1,3.6 39.1,3.6 5.6,4.6 14.6,4.6 15.6,4.6 16.6,4.6 17.6,4.6 18.6,4.6 19.6,4.6 24.6,4.6 26.6,4.6 33.6,4.6 34.6,4.6 37.6,4.6 38.6,4.6 33.1,5.6 34.1,5.6 35.1,5.6 38.1,5.6 39.1,5.6 31.6,6.6 32.6,6.6 33.6,6.6 34.6,6.6 35.6,6.6 36.6,6.6 2.1,7.6 6.6,8.6 7.6,8.6 6.1,9.6 7.1,9.6 8.1,9.6 9.1,9.6 10.1,9.6 11.1,9.6 12.1,9.6 13.1,9.6 15.1,9.6 27.1,9.6 28.1,9.6 29.1,9.6 32.1,9.6 33.1,9.6 34.1,9.6 35.1,9.6 1.6,10.6 2.6,10.6 3.6,10.6 8.6,10.6 10.6,10.6 6.1,13.6 8.1,13.6 11.1,13.6 14.1,13.6 0.6,14.6 1.6,14.6 2.6,14.6 3.6,14.6 4.6,14.6 6.6,14.6 7.6,14.6 8.6,14.6 9.6,14.6 10.6,14.6 1.1,15.6 2.1,15.6 9.1,15.6 0.6,16.6 1.6,16.6 6.6,16.6 9.1,17.6 12.1,17.6 0.6,18.6 2,18.6 2.8,18.6 11.6,18.6 12.6,18.6 5.1,19.6 6.1,19.6 7.1,19.6 0.6,20.6 5.6,20.6 6.6,20.6 2.1,21.6 3.1,21.6 1.1,23.6 2.1,23.6 3.1,23.6 1.6,24.6 2.6,24.6 2.1,25.6 3.1,25.6 10.1,25.6 0.6,26.6 1.6,26.6 9.6,26.6 10.6,26.6 11.6,26.6 12.6,26.6 3.1,27.6 5.1,27.6 8.1,27.6 10.1,27.6 15.6,28.6 20.6,28.6
  other v2: 7.475,6.3 8.525,6.3
GND_A: A1.2 C8.1 C9.1 C10.1 C11.2 C13.1 C14.1 C15.1 C16.1 L3.2 L5.2 MCU1.33 Y1.2 Y1.4 | length 5.6
  Top Layer w0.254: C11.2@16.1,23.575 C11.2 v1(16.2,23.6) ; v1(27.5,29.3) 27.5,28.407 C13.1 ; v1(33.5,11.1) C8.1 ; v1(33.9,29) A1.2 ; v1(35.9,11.1) 35.9,11.771 C9.1 C10.1
  other v1: 22.7,11.7 24.6,11.7 31,16.4 33.4,20.6 22.7,28.4 25.1,28.4 29.9,28.5
  other v2: 25.1,20.725 23.625,22.2 25.1,22.2 26.575,22.2 25.1,23.675
IN2_N: U3.B3 U4.10 | length 33.8
  Top Layer w0.09: U3.B3 19.4,17.9 19.4,16.7 20,16.1 v1(20,13.9)
  Bottom Layer w0.254: v1(20,13.9) 20,9.9 21.2,8.7 35.9,8.7 37.3,10.1 37.3,15.2 37.745,15.645 U4.10
IN2_P: U3.B2 U4.3 | length 17.8
  Top Layer w0.09: U3.B2 19.8,17.9 20.4,17.9 21.054,17.246 21.253,17.246 v1(21.3,17.199)
  Bottom Layer w0.254: v1(21.3,17.199) 22.099,16.4 29.6,16.4 30.3,15.7 36.345,15.7 U4.3
IN_N: U3.A3 U4.2 | length 20.9
  Top Layer w0.09: U3.A3 19.2,16.174 19.4,15.974 v1(19.4,15.9)
  Top Layer w0.254: v1(31.115,14.547) 31.147,14.547 32.2,15.6 v1(32.2,16.4)
  Bottom Layer w0.254: v1(19.4,15.9) 29,15.9 30.353,14.547 v1(31.115,14.547) ; v1(32.2,16.4) 34.7,16.4 35.145,16.845 U4.2
IN_P: U3.A2 U4.1 | length 19
  Top Layer w0.09: U3.A2 19.6,17.1 20,16.7 v1(20.4,16.7)
  Bottom Layer w0.254: v1(20.4,16.7) 20.4,17.2 21,17.8 24.7,17.8 25.4,17.1 34.1,17.1 35.1,18.1 36.345,18.1 U4.1
JTAG_TCKC: J1.5 MCU1.14 | length 29.1
  Top Layer w0.09: v1(6.9,21.4) 6.9,22.3 4.7,24.5 4.7,25.4 6.3,27 8.8,27 9.18,27.38 J1.5 ; v1(21.1,20.2) 21.1,20.284 21.197,20.381 21.197,20.397 22.25,21.45 MCU1.14
  Bottom Layer w0.09: v1(6.9,21.4) 7.3,21.8 20.7,21.8 21.1,21.4 v1(21.1,20.2)
JTAG_TMSC: J1.6 MCU1.13 | length 26.7
  Top Layer w0.09: v1(4.6,21.8) 4.1,22.3 4.1,25.6 6.64,28.14 J1.6 ; v1(21.559,21.354) 22.155,21.95 MCU1.13
  Top Layer w0.254: MCU1.13@22.698,21.952 MCU1.13
  Bottom Layer w0.09: v1(4.6,21.8) 4.6,21.841 4.867,22.107 20.806,22.107 v1(21.559,21.354)
Net*1_2: LED.2 R8.1 | length 6.3
  Top Layer w0.254: R8.1@13.625,24.05 R8.1@13.7,24.05
  Bottom Layer w0.254: v1(8.1,24.3) 8.9,24.3 9.8,23.4 13.1,23.4 v1(13.7,24)
Net*1_4: LED.4 R7.1 | length 4.4
  Top Layer w0.254: R7.1 v1(11.896,24.05)
  Bottom Layer w0.254: v1(8.062,25.255) 8.09,25.283 8.637,25.283 8.654,25.3 9,25.3 10.25,24.05 v1(11.896,24.05)
NetA1_1: A1.1 C12.2 | length 3.1
  Top Layer w0.254: C12.2 32.655,28.198 33.002,28.198 34.3,26.9 A1.1 A1.1
NetADXL1_8: ADXL1.8 MCU1.20 | length 14.2
  Top Layer w0.09: ADXL1.8 v1(14.2,18.2) ; v1(24.8,18.4) 24.825,18.425 24.825,19.775 MCU1.20
  Bottom Layer w0.09: v1(14.2,18.2) 14.2,18.9 14.7,19.4 18.2,19.4 18.9,18.7 21.4,18.7 21.7,18.4 v1(24.8,18.4)
NetBME1_6: BME1.6 BME1.8 C30.2 C31.2 | length 12.5
  Top Layer w0.254: C31.2@7.9,17.529 C31.2 ; v1(7.9,19.2) 7.9,19.8 ; BME1.6@8.78,20.1 BME1.6 8.18,20.08 7.9,19.8 ; v1(9.9,21) 9.872,21.028 9.872,21.36 9.566,21.667 8.813,21.667 BME1.8 8.08,21.68 7.9,21.5 7.9,19.8
  Bottom Layer w0.254: v1(7.9,17.5) v1(7.9,19.2) ; v1(9.9,21) 14.635,21 14.735,20.9 v1(14.775,20.9)
NetBUZZ1_1: BUZZ1.1 MCU1.22 | length 27.8
  Top Layer w0.09: MCU1.22@25.819,19.769 MCU1.22
  Top Layer w0.254: MCU1.22 25.852,19.798 25.852,19.002 v1(25.856,18.998)
  Bottom Layer w0.254: v1(0.654,21.862) 1.293,22.5 21.2,22.5 24.2,19.5 25.354,19.5 v1(25.856,18.998)
NetC1_2: "Coin Battery CR1.1" C1.2 C5.1 L2.2 L4.1 U1.A1 U1.A2 U2.1 U2.3 | length 57.3
  Top Layer w0.15: 0.8,8.7 U1.A2 U1.A1
  Top Layer w0.254: 0.8,8.7 0.7,8.6 0.7,6.65 1.102,6.248 1.102,6.198 1.45,5.85 C1.2@1.55,5.85 ; C1.2 1.848,5.502 1.937,5.502 3.5,3.939 v3(3.5,3.9) 3.55,3.9 4.95,2.5 C5.1 ; U2.1 6.825,5.325 6.2,4.7 6.2,3.65 5.05,2.5 5.906,2.5 6.777,1.629 6.777,1.548 7.075,1.25 L2.2 8.525,1.25 9.6,2.325 9.6,4.275 8.673,5.202 8.673,5.302 U2.3
  Top Layer w0.5: v3(30.7,6.4) L4.1
  Bottom Layer w0.254: 3.146,3.246 3.146,3.146 3.146,3.546 v3(3.5,3.9)
  Bottom Layer w0.5: 3.146,3.246 3.296,3.396 3.65,3.75 5.8,5.9 7.021,5.9 7.225,5.696 8.775,5.696 8.979,5.9 30.2,5.9 v3(30.7,6.4)
NetC4_1: C4.1 R1.1 R2.1 U1.D2 | length 6.6
  Top Layer w0.15: 0.8,9.9 U1.D2
  Top Layer w0.254: 0.8,9.9 0.7,10 0.7,11 0.9,11.2 0.9,11.679 R2.1@0.881,11.698 ; R2.1 R2.1@0.881,11.698 ; C4.1@4.791,11.254 3.208,11.254 2.762,11.7 R1.1 0.883,11.7 R2.1@0.881,11.698
NetC11_1: C11.1 MCU1.12 | length 7.6
  Top Layer w0.09: C11.1@16.225,25 C11.1 17.075,25.025 17.9,24.2 v1(19.3,24.2) ; v1(22.011,22.511) 22.041,22.48 22.67,22.48 MCU1.12
  Bottom Layer w0.09: v1(19.3,24.2) 20.1,24.2 21.753,22.547 21.975,22.547 v1(22.011,22.511)
NetC12_1: C12.1 C14.2 L7.2 | length 5.7
  Top Layer w0.254: C14.2@30.256,26.742 C14.2 C12.1 ; C12.1@32.478,26.975 33,26.453 L7.2@33,24.65 ; L7.2@32.819,24.809 32.841,24.809 L7.2@33,24.65 ; L7.2 L7.2@33,24.65
NetC28_2: C28.2 U3.D2 | length 13.2
  Top Layer w0.09: C28.2 16.55,9.025 16.98,9.455 16.98,9.505 18.2,10.725 18.2,16.3 v1(18.6,16.7) ; U3.D2 19.8,18.7 20.2,18.7 20.6,18.3 v1(20.9,18.3)
  Bottom Layer w0.09: v1(18.6,16.7) 20.3,18.4 20.508,18.4 20.565,18.343 20.857,18.343 v1(20.9,18.3)
NetL1_1: L1.1 U1.C1 | length 4.4
  Top Layer w0.15: U1.C1 2.4,9.5 ; L1.1@3.875,8.15 L1.1
  Top Layer w0.254: 2.4,9.5 3.8,9.5 4.5,8.8 4.5,8.25 L1.1
NetL1_2: L1.2 U1.B1 | length 4.9
  Top Layer w0.15: U1.B1 2.4,9.1
  Top Layer w0.254: 2.4,9.1 2.9,8.6 2.9,6.6 3.049,6.451 4.049,6.451 L1.2@4.3,6.2
NetL2_1: L2.1 U2.2 | length 2.2
  Top Layer w0.15: L2.1 L2.1@8,3.4
  Top Layer w0.254: L2.1@8,3.4 U2.2
NetM1_1: M1.1 MCU1.23 | length 12.7
  Top Layer w0.254: MCU1.23 26.35,17.25 27.9,15.7 27.9,13.6 v1(27.2,12.9)
  Bottom Layer w0.254: v1(24,9.4) 24.007,9.407 24.007,9.707 v1(27.2,12.9)
NetMCU1_15: MCU1.15 R5.1 | length 6.7
  Top Layer w0.09: R5.1 23.875,16.25 24.23,15.895 R5.1@24.23,15.874
  Top Layer w0.254: MCU1.15 22.25,20.95 21.9,20.6 21.9,19.3 23.452,17.748 23.452,16.523 23.725,16.25 R5.1
NetMCU1_16: MCU1.16 U3.E3 | length 4.4
  Top Layer w0.09: U3.E3 19.4,19.1 v1(20.7,19.1)
  Top Layer w0.254: v1(22.5,20) 22.528,20.028 22.528,20.448 22.53,20.45 MCU1.16
  Bottom Layer w0.09: v1(20.7,19.1) 21.6,19.1 v1(22.5,20)
NetMCU1_21: MCU1.21 SW1.2 | length 14.5
  Top Layer w0.09: v1(20.8,12.4) 20.8,12.85 SW1.2@21.155,13.205
  Top Layer w0.254: MCU1.21 25.35,17.25 27.2,15.4 v1(27.2,14.1)
  Bottom Layer w0.254: v1(20.8,12.4) 22.5,14.1 v1(27.2,14.1)
NetMCU1_24: MCU1.24 R7.2 | length 21.5
  Top Layer w0.09: R7.2@11.466,25.201 R7.2@11.878,25.297 ; MCU1.24 26.85,19.826 MCU1.24@26.924,19.9
  Top Layer w0.254: MCU1.24@26.852,19.9 28.26,19.9 28.36,19.8 v1(28.4,19.8)
  Bottom Layer w0.254: v1(11.9,25.2) 12.5,24.6 14.6,24.6 15.4,25.4 21.2,25.4 26.8,19.8 v1(28.4,19.8)
NetMCU1_25: MCU1.25 R8.2 | length 19.7
  Top Layer w0.09: MCU1.25 MCU1.25@27.505,20.445
  Top Layer w0.254: MCU1.25@27.673,20.45 28.91,20.45 28.96,20.5 v1(29,20.5)
  Bottom Layer w0.254: v1(13.7,25.3) 14.93,26.53 21.47,26.53 27.5,20.5 v1(29,20.5)
NetR3_2: R3.2 R4.1 U2.4 | length 5.3
  Top Layer w0.254: U2.4 9.225,7.275 9.299,7.201 9.4,7.1 9.4,5.6 9.8,5.2 R3.2 R4.1
NetR5_2: R5.2 R6.2 U3.F1 | length 7.9
  Top Layer w0.09: U3.F1 20.4,20.1 20.6,20.1 22.4,18.3 22.4,16.605 22.045,16.25 R6.2
  Top Layer w0.254: R6.2 22.269,15.977 22.523,15.977 23.277,15.223 23.527,15.223 R5.2
RESET_N: J1.7 MCU1.19 | length 34.8
  Top Layer w0.09: v1(24.3,18.9) 24.35,18.95 MCU1.19
  Bottom Layer w0.09: J1.7 4.1,25.5 6.6,23 14.5,23 16.5,25 21.1,25 23,23.1 23,21.3 24.3,20 25.7,20 26.5,19.2 26.5,18.5 26.3,18.3 25.7,18.3 25.1,18.9 v1(24.3,18.9)
RF_N: L6.1 MCU1.2 | length 5.9
  Top Layer w0.254: MCU1.2 26.35,25.179 26.671,25.5 30.323,25.5 31.173,24.65 L6.1
RF_P: C13.2 L6.2 L7.1 MCU1.1 | length 13.6
  Top Layer w0.09: MCU1.1 26.85,24.656 MCU1.1@26.924,24.73
  Top Layer w0.254: MCU1.1 29.9,24.6 30.7,23.8 31.145,23.8 L6.2 31.6,23.771 ; C13.2 27.554,26.953 28.507,26 31.3,26 32.1,25.2 32.1,24.271 31.6,23.771 ; L7.1 31.6,23.771
RX_SUP: C21.2 C22.2 C25.2 C26.2 L8.2 U3.A4 U3.C1 | length 22.3
  Top Layer w0.09: L8.2@18.482,6.616 18.625,6.759 L8.2@18.638,6.759 ; L8.2@18.679,6.775 L8.2 18.654,7.854 19,8.2 19,17.5 U3.A4 19,17.9 19,18.2 19.1,18.3 19.8,18.3 U3.C1
  Top Layer w0.254: L8.2@18.679,6.775 20.759,6.775 C21.2 ; C21.2@20.759,6.825 C21.2 ; C26.2@27.8,6.825 C25.2 C22.2 C21.2
SCL: BME1.4 MCU1.7 pad.13 SGPC1.6 | length 24.5
  Top Layer w0.09: SGPC1.6 3.25,17.4 3.5,17.4 4.5,18.4 10.3,18.4 11.025,19.125 11.045,19.125 BME1.4 ; BME1.4@11.355,19.435 11.435,19.435 13.9,21.9 19.704,21.9 20.3,22.496 20.3,23.066 22.051,24.817 22.433,25.199 23.701,25.199 23.85,25.05 MCU1.7
SDA: BME1.3 MCU1.6 pad.10 SGPC1.3 | length 28.6
  Top Layer w0.09: SGPC1.3 1.6,20.2 1.9,20.5 4,20.5 4.4,20.1 4.4,19 4.7,18.7 9.6,18.7 10.918,20.018 11.137,20.018 BME1.3 11.58,20.08 13.7,22.2 19.6,22.2 20,22.6 20,23.2 22.3,25.5 24.1,25.5 24.35,25.25 MCU1.6
SPI_CLK: ADXL1.4 MCU1.8 pad.14 U3.F3 | length 14.5
  Top Layer w0.09: ADXL1.4 16.7,16.6 16.9,16.8 16.9,20.1 17.8,21 18.5,21 19.2,21 ; U3.F3 19.2,21 ; MCU1.8 22.141,24.6 20.6,23.059 20.6,22.1 20.4,21.9 20.1,21.9 19.2,21
SPI_IN: ADXL1.6 MCU1.9 pad.8 U3.F2 | length 14.3
  Top Layer w0.09: ADXL1.6 15.2,17.625 16.475,18.9 16.475,21.275 v1(16.5,21.3) ; U3.F2 19.6,20.6 v1(20.3,21.3) 20.87,21.87 20.87,23.022 21.798,23.95 MCU1.9
  Bottom Layer w0.09: v1(16.5,21.3) v1(20.3,21.3)
SPI_OUT: ADXL1.7 MCU1.10 pad.9 U3.E2 | length 14.8
  Top Layer w0.09: ADXL1.7 14.7,17.9 16,19.2 v1(16,20.8) ; U3.E2 19.8,19.5 19.8,19.9 20.547,20.647 20.547,20.731 20.597,20.781 20.597,20.797 21.087,21.287 21.087,22.932 21.789,23.634 22.183,23.634 22.336,23.481 22.669,23.481 MCU1.10
  Bottom Layer w0.09: v1(16,20.8) 19.508,20.8 19.708,20.6 v1(20.5,20.6)
TDI: J1.4 MCU1.26 | length 23.4
  Top Layer w0.254: MCU1.26@27.673,20.95 28.65,20.95 28.8,21.1 v1(29.6,21.1)
  Bottom Layer w0.09: J1.4 13.22,26.9 20.7,26.9 21.3,27.5 22.294,27.5 28.694,21.1 v1(29.6,21.1)
TDO: J1.3 MCU1.27 | length 19.8
  Top Layer w0.254: MCU1.27 28.51,21.45 28.86,21.8 v1(28.9,21.8)
  Bottom Layer w0.09: J1.3 15.46,27.2 20.4,27.2 21,27.8 22.9,27.8 26.266,24.434 26.966,24.434 28.9,22.5 v1(28.9,21.8)
TX2: U3.E5 U4.6 | length 24.1
  Top Layer w0.09: v1(17.6,18.9) 18,19.3 U3.E5
  Bottom Layer w0.254: v1@17.6,18.899 18,18.499 18,15.9 18.8,15.1 27.9,15.1 29.007,13.993 30.941,13.993 30.967,13.966 33.555,13.966 35.422,12.1 36.345,12.1 U4.6
TX3: U3.E4 U4.8 | length 45.2
  Top Layer w0.09: v1(17.7,19.9) 17.7,19.858 18.058,19.5 18.6,19.5 U3.E4
  Bottom Layer w0.254: v1(17.7,19.9) 14.2,19.9 13.4,19.1 13.4,16.8 16.3,13.9 16.3,9.2 18.1,7.4 36.5,7.4 38.1,9 38.1,13 38.3,13.2 38.831,13.2 U4.8
TX4: U3.C5 U4.9 | length 36.5
  Top Layer w0.09: v1(17.4,17.9) 18,18.5 U3.C5
  Bottom Layer w0.254: v1(17.4,17.9) 17,17.5 17,11.1 19.9,8.2 36.3,8.2 37.7,9.6 37.7,14 38.144,14.444 38.875,14.444 U4.9
TX_SUP: C6.2 C7.2 C17.2 C18.2 C19.2 C20.2 MCU1.17 R3.1 U2.5 U3.F5 U4.4 U4.5 U4.7 | length 90.4
  Top Layer w0.09: U3.F5 v1(18.4,20.3)
  Top Layer w0.254: U2.5 8,7.8 8.3,8.1 9.7,8.1 ; R3.1 10.396,7.404 9.7,8.1 ; C7.2 C6.2 C6.2@13.1,3 ; C18.2 C17.2 15.437,3 C6.2@13.1,3 ; C18.2@17.896,2.95 20.271,2.95 C19.2 ; C19.2@20.3,2.925 22.675,2.925 v1(22.7,2.9) 22.75,2.95 28.55,2.95 29.5,3.9 29.5,7.6 28.5,8.6 26.5,8.6 25.7,9.4 25.7,16.1 23.35,18.45 ; v1(22.8,19.3) 22.807,19.293 22.807,18.993 23.35,18.45 ; MCU1.17 23.35,18.45 ; v1(36.4,14.3) 38.9,14.3 39.3,13.9 39.3,11.022 38.9,10.622 v1(38.9,10.6) ; 9.7,8.1 13,8.1 13.5,7.6 13.5,4.1 13.1,3.7 C6.2@13.1,3
  Bottom Layer w0.09: v1(18.4,20.3) 19.1,19.6 21.3,19.6 22.2,20.5 22.7,20.5 23.1,20.1 23.1,19.6 v1(22.8,19.3)
  Bottom Layer w0.254: v1(22.7,2.9) 34.2,2.9 38.9,7.6 v1(38.9,10.6) 38.9,12.021 U4.7 ; U4.5 U4.4
VDD: ADXL1.1 ADXL1.14 BME1.2 C2.2 C3.2 C4.2 C23.2 C24.2 C27.2 C29.1 L8.1 R1.2 SGPC1.1 SGPC1.5 SW1.1 U1.D1 U3.C4 | length 61.5
  Top Layer w0.09: 16,13.379 17.4,14.779 17.4,17.1 18,17.7 18,18.2 18.1,18.3 18.6,18.3 U3.C4
  Top Layer w0.15: U1.D1 2.3,9.9
  Top Layer w0.254: 2.3,9.9 5.4,9.9 5.9,10.4 5.9,12.004 C4.2@5.204,12.7 ; SGPC1.5 2.4,17 3.325,16.075 v1(4.1,16.075) C29.1 5.5,13.367 4.837,12.704 C4.2@4.791,12.704 ; R1.2 4.496,13 C4.2@4.791,12.704 ; SGPC1.1 3.248,19.75 3.273,19.725 3.684,19.725 3.9,19.509 v1(3.9,19.5) ; C4.2 C4.2@4.791,12.704 ; C4.2@5.2,12.704 C4.2@5.204,12.7 ; C3.2 C4.2@5.204,12.7 ; C3.2@7.2,12.7 C2.2 C23.2 ; C24.2 10.575,16 11.4,16 12,15.4 C23.2 ; BME1.2@11.18,20.9 BME1.2 ; ADXL1.14 14.2,14.575 14.177,14.552 13.902,14.552 C23.2@12.05,12.7 ; C27.2 15.35,12.729 16,13.379 16,15.088 ADXL1.1 ; SW1.1@17.4,12.998 17.127,12.725 15.3,12.725 15.275,12.7 C23.2@12.05,12.7 ; L8.1@18.358,5.425 16.775,5.425 14.1,8.1 14.1,11.1 12.848,12.352 12.348,12.352 C23.2 ; C23.2 C23.2@12.05,12.7
  Bottom Layer w0.254: v1(3.9,19.5) 3.9,16.297 4.1,16.097 v1(4.1,16.075)
VDDS: C8.2 C9.2 C10.2 J1.2 J1.8 L4.2 MCU1.11 MCU1.18 MCU1.28 MCU1.29 | length 8
  Top Layer w0.254: v1(22,23.1) 22.008,23.092 22.251,23.092 22.393,22.95 MCU1.11 ; v1(23.848,19.288) v1(23.848,19.288) 23.849,19.799 MCU1.18 ; MCU1.28@27.673,21.95 28.051,21.95 v1(28.3,22.2) ; MCU1.29@27.673,22.45 28.05,22.45 v1(28.3,22.2) ; L4.2 v1(30.7,13.412) ; L4.2@31.2,13.375 L4.2@31.25,13.325 ; v1(33.2,13.2) 33.475,13.2 C8.2 33.525,13.2 35.879,13.2 C9.2 C10.2
X24M_N: MCU1.30 Y1.1 | length 4.7
  Top Layer w0.254: MCU1.30 29,22.95 30.527,21.423 30.527,21.073 Y1.1
X24M_P: MCU1.31 Y1.3 | length 11.1
  Top Layer w0.254: MCU1.31 29.45,23.45 30.6,22.3 31.7,22.3 32.2,21.8 32.2,18.1 33.4,16.9 Y1.3
X32K_Q1: C15.2 MCU1.4 Y2.2 | length 10.3
  Top Layer w0.09: Y2.2@18.8,25.351 19.951,25.351 20.2,25.6 20.2,26.1 21.8,27.7 24.303,27.7 25.05,26.953 C15.2
  Top Layer w0.254: C15.2 25.35,26.703 MCU1.4
X32K_Q2: C16.2 MCU1.5 Y2.1 | length 10.4
  Top Layer w0.09: Y2.1@18.6,23.051 Y2.1@18.632,23.082 ; Y2.1@19,23.1 Y2.1 19.055,23.555 19.655,23.555 21.6,25.5 21.6,26.4 21.9,26.7 22.421,26.7 C16.2
  Top Layer w0.254: C16.2 22.971,26.7 23.8,26.7 24.85,25.65 MCU1.5
pads on no net: ADXL1.2 ADXL1.3 ADXL1.5 ADXL1.9 ADXL1.10 ADXL1.11 ADXL1.15 BUZZ1.3 MCU1.3 MCU1.32 U3.C2 U3.C3 U3.D3 U3.F4 U4.11 U4.12
copper on no net:
  other v4: 34.698,29

## Polygon pours and split planes (outlines as drawn)
GND on GND "GND_L02_P001" (solid, pour order 1): 0,30 0,0 40,0 40,10.7 15.5,10.7 15.5,25.7 21.2,25.7 21.2,30
GND on GND "GND_L02_P004" (solid, pour order 4): 15.5,21.7 21.263,21.7 21.263,18.637 21.3,18.6 26.1,18.6 26.1,12.4 21.7,12.4 21.7,10.7 15.5,10.7
GND_A on GND "GND_A_L02_P003" (solid, pour order 3): 21.2,30 40,30 40,10.7 21.7,10.7 21.7,12.4 26.1,12.4 26.1,18.6 21.3,18.6 21.3,21.7 15.5,21.7 15.5,25.7 21.2,25.7
VDDS on POWER "VDDS_L03_P005" (solid, pour order 5): 0,30 40,30 40,0 0,0
GND on Top Layer "GND_L01_P006" (solid, pour order 6): 0,30 40.1,30 40.1,0 40,-0.1 39.9,0 0.1,0
GND on Bottom Layer "GND_L04_P007" (solid, pour order 7): -0.4,30.3 41,30.3 41.4,29.9 40.6,29.1 40.6,-0.6 -0.2,-0.6 -0.9,-1.3

## Silkscreen, mask and mechanical layers (free items; w line width, h text height)
Top Overlay:
  region: 34.412,4.658 34.335,5.044 34.315,5.102 35.723,5.121 35.742,5.025 35.704,4.909 35.626,4.562 34.45,4.543 34.431,4.639
  region: 36.417,8.399 36.475,8.341 36.513,8.187 36.513,7.917 36.513,7.878 36.475,5.565 36.417,5.507 36.263,5.468 33.641,5.507 33.583,5.565 33.544,5.719 33.583,8.341 33.641,8.399 33.795,8.438 hole: 34.643,8.052 34.508,7.994 34.277,7.416 34.18,7.165 34.065,7.126 33.795,7.088 33.737,6.914 33.833,6.779 34.412,6.818 34.47,6.876 34.547,7.069 34.605,7.204 34.836,6.047 34.894,5.912 34.952,5.854 35.144,5.892 35.202,5.95 35.684,6.934 36.224,6.972 36.321,7.069 36.282,7.261 36.108,7.319 35.492,7.281 35.395,7.184 35.106,6.625 34.913,7.589 34.875,7.743 34.855,7.917 34.836,7.936 34.797,8.013
  region: 34.759,8.785 34.315,8.804 34.354,8.958 34.45,9.363 35.626,9.344 35.665,9.19 35.742,8.804 34.797,8.785
  text "feel2022_" at 30.853,2.32 h1
  text "barba_boyarizo" at 25.753,0.786 h1

## Text inside footprints (layer, text, board x,y; h text height)
BME1: Top Overlay "BME680" at 10.371,20.236 h0.1 r90